# Altium PCB Analizador_de_espectro.PcbDoc (part 2 of 2)
Units mil, origin at the board's own origin, x right, y up, seen from the top; angles counter-clockwise.
Board outline 4891.73 x 3750 mil, 2 copper layers (Top Layer, Bottom Layer); 140 components, 98 nets, 612 pads, 248 vias.
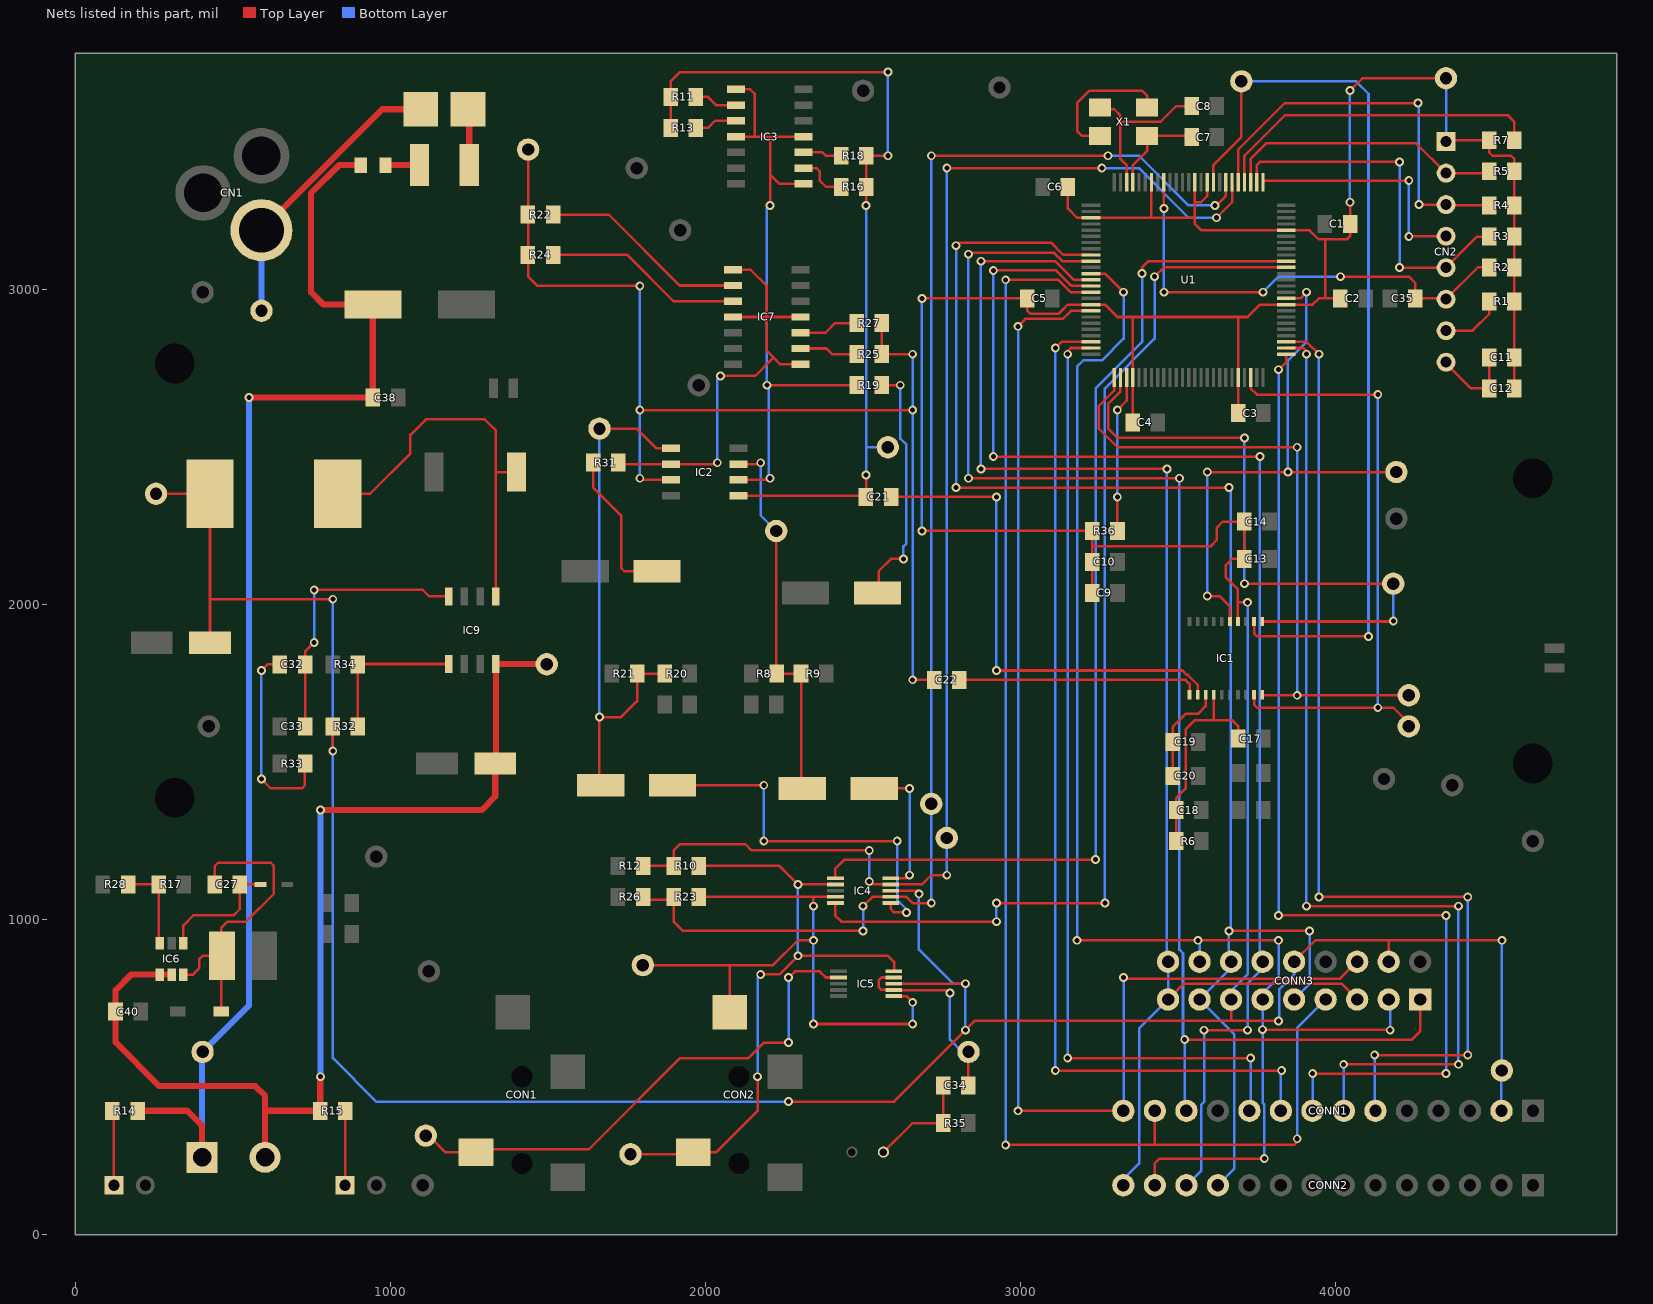
[diagram p2: the nets of this part, all layers, seen from the top]

## Via types
v1: diameter 28, hole 16, Top Layer to Bottom Layer, 248 vias

## Nets (pads, with @x,y where several pads share a name; then routed paths per layer and width w, separated by ;. In a path a pad name is that pad's centre, name@x,y a point inside that pad or via, vN(x,y) a via of type N, cw(c..) or ccw(c..) an arc to the next point about the centre after c; other vN are vias at no path point) (continued)
LCD_CS: CONN1.7 U1.77 | length 3326.3
  Top Layer w8: U1.77@3843.5,2814.96 3897.64,2814.96 3907.48,2805.12 v1(3907.48,2795.28) ; v1(3907.48,1043.31) v1(4389.76,1043.31) ; v1(4025.59,541.34) v1(4389.76,541.34)
  Bottom Layer w8: v1(3907.48,1043.31) v1(3907.48,2795.28) ; v1(4025.59,541.34) 4025.59,394.49 CONN1.7@4026.38,393.7 ; v1(4389.76,541.34) v1(4389.76,1043.31)
LCD_RD: CONN1.10 U1.49 | length 3071.7
  Top Layer w8: v1(3149.61,561.02) v1(3730.32,561.02) ; v1(3149.61,2795.28) 3149.61,2805.12 3159.45,2814.96 U1.49@3223.43,2814.96
  Bottom Layer w8: v1(3149.61,561.02) v1(3149.61,2795.28) ; CONN1.10@3726.38,393.7 3730.32,397.64 v1(3730.32,561.02)
LCD_RS: CONN1.8 U1.76 | length 3366.8
  Top Layer w8: v1(3818.9,1013.78) v1(4350.39,1013.78) ; v1(3818.9,2746.06) 3843.5,2770.67 U1.76@3843.5,2795.28 ; v1(3927.17,511.81) v1(4350.39,511.81)
  Bottom Layer w8: v1(3818.9,1013.78) v1(3818.9,2746.06) ; CONN1.8@3926.38,393.7 3927.17,394.49 v1(3927.17,511.81) ; v1(4350.39,511.81) v1(4350.39,1013.78)
LCD_RST: CONN1.6 U1.78 | length 3289.9
  Top Layer w8: U1.78@3843.5,2834.65 3907.48,2834.65 v1(3946.85,2795.28) ; v1(3946.85,1072.83) v1(4419.29,1072.83) ; v1(4124.02,570.87) v1(4419.29,570.87)
  Bottom Layer w8: v1(3946.85,1072.83) v1(3946.85,2795.28) ; v1(4124.02,570.87) 4124.02,396.06 CONN1.6@4126.38,393.7 ; v1(4419.29,570.87) v1(4419.29,1072.83)
LCD_WR: CONN1.9 U1.48 | length 3262.1
  Top Layer w8: v1(3110.24,521.65) v1(3828.74,521.65) ; v1(3110.24,2814.96) 3129.92,2834.65 U1.48@3223.43,2834.65
  Bottom Layer w8: v1(3110.24,521.65) v1(3110.24,2814.96) ; CONN1.9@3826.38,393.7 3826.38,519.29 v1(3828.74,521.65)
MIC-CH: C34.2 IC5.7 IC5.9 TP24.1 | length 635.5
  Top Layer w8: IC5.9@2597.44,816.93 2559.06,816.93 2549.21,807.09 2549.21,787.4 2559.06,777.56 IC5.7@2597.44,777.56 2599.22,775.78 2767.53,775.78 v1(2775.59,767.72) ; C34.2@2834.45,474.8 2834.45,580.51 TP24.1@2834.65,580.71
  Bottom Layer w8: v1(2775.59,767.72) 2775.59,620.08 2814.96,580.71 TP24.1@2834.65,580.71
MISO: CONN2.13 CONN3.2 CONN3.6 CONN3.17 U1.37 | length 4635.2
  Top Layer w8: v1(3179.13,935.04) v1(3562.99,935.04) v1(3818.9,935.04) ; U1.37@3223.43,3051.18 3267.72,3051.18 v1(3326.77,2992.13) ; CONN2.13@3426.38,157.48 3426.38,227.56 3440.88,242.06 v1(3773.69,242.06) ; v1(3768.11,651.18) 4171.65,651.18 v1(4173.23,649.61)
  Bottom Layer w8: v1(3179.13,935.04) 3179.13,2755.91 3198.94,2775.72 3258,2775.72 3326.77,2844.49 v1(3326.77,2992.13) ; CONN2.13@3425.2,158.66 CONN2.13@3426.38,157.48 ; CONN3.17@3568.11,867.09 v1@3568.11,935.04 ; v1(3773.69,242.06) 3773.81,242.19 3773.81,413.35 3768.11,419.05 v1(3768.11,651.18) CONN3.6@3768.11,747.09 3768.11,766.14 3818.9,816.93 v1(3818.9,935.04) ; CONN3.2@4168.11,747.09 4173.23,741.97 v1(4173.23,649.61)
MOSI: CONN2.14 CONN3.3 CONN3.9 CONN3.18 U1.38 | length 4599.2
  Top Layer w8: v1(2874.02,2431.1) v1(3464.57,2431.1) ; v1(2874.02,3090.55) 3109.88,3090.55 3168.93,3031.5 U1.38@3223.43,3031.5 ; CONN3.9@3468.11,747.09 3518.27,797.24 4017.95,797.24 CONN3.3@4068.11,747.09
  Bottom Layer w8: v1(2874.02,2431.1) v1(2874.02,3090.55) ; CONN2.14@3326.38,157.48 3326.38,176.77 3375.98,226.38 3375.98,654.96 CONN3.9@3468.11,747.09 CONN3.18@3468.11,867.09 3464.57,870.63 v1(3464.57,2431.1)
Netc7_2: C7.2 U1.22 X1.1 | length 302.6
  Top Layer w8: U1.22@3356.3,3341.54 3356.3,3395.67 3401.57,3440.94 X1.1@3401.57,3488.19 C7.2@3538.74,3488.19
Netc8_2: C8.2 U1.23 X1.3 | length 541.5
  Top Layer w8: X1.3@3251.97,3578.74 3257.87,3572.83 3297.24,3572.83 3316.93,3553.15 3316.93,3533.46 ; U1.23@3336.61,3341.54 3336.61,3395.67 3316.93,3415.35 3316.93,3533.46 ; C8.2@3542.68,3582.68 3494.09,3582.68 3444.88,3533.46 3316.93,3533.46
Netc11_2: C11.2 C12.2 CN2.8 | length 272.5
  Top Layer w8: CN2.8@4350.39,2770.08 4350.39,2765.75 4429.13,2687.01 C12.2@4487.56,2687.01 C11.2@4487.56,2785.43
NetC17_1: C17.1 C18.2 IC1.4 R6.2 | length 673.4
  Top Layer w8: R6.2@3493.46,1250 C18.2@3493.46,1348.43 3493.46,1387.17 3523.62,1417.32 3523.62,1604.33 3553.15,1633.86 3671.26,1633.86 3690.32,1614.8 C17.1@3690.32,1574.8 ; 3613.19,1634.84 IC1.4@3613.19,1714.57
NetC19_1: C19.1 C20.2 IC1.3 | length 324
  Top Layer w8: C20.2@3483.62,1456.69 C19.1@3483.62,1564.96 3483.62,1613.54 3523.62,1653.54 3562.99,1653.54 3587.6,1678.15 IC1.3@3587.6,1714.57
NetC21_1: C21.1 IC1.2 | length 1574.2
  Top Layer w8: C21.1@2589.21,2342.52 v1(2923.23,2342.52) ; v1(2923.23,1791.34) 3513.78,1791.34 3527.31,1777.81 3530.25,1777.81 3562.01,1746.05 IC1.2@3562.01,1714.57
  Bottom Layer w8: v1(2923.23,1791.34) v1(2923.23,2342.52)
NetC22_1: C22.1 IC1.1 | length 770.4
  Top Layer w8: C22.1@2805.75,1761.81 3523.62,1761.81 3536.42,1749.02 IC1.1@3536.42,1714.57
NetC24_1: C24.1 IC2.3 R8.1 R9.2 TP13.1 | length 1208.1
  Top Layer w8: IC2.3@2105.31,2446.26 2170.67,2446.26 v1(2175.2,2450.79) ; TP13.1@2224.41,2234.25 2224.41,1782.76 R8.1@2225.67,1781.5 R9.2@2303.15,1781.5 2303.15,1421.26 C24.1@2307.09,1417.32
  Bottom Layer w8: v1(2175.2,2450.79) 2175.2,2283.46 2219.49,2239.17 TP13.1@2219.49,2229.33
NetC24_2: C24.2 IC4.10 | length 451.9
  Top Layer w8: C24.2@2535.43,1417.32 v1(2647.64,1417.32) ; IC4.10@2587.6,1131.89 2637.8,1131.89 v1(2647.64,1141.73)
  Bottom Layer w8: v1(2647.64,1141.73) v1(2647.64,1417.32)
NetC25_1: C25.1 R19.2 | length 787.4
  Top Layer w8: C25.1@2545.28,2037.4 2549.21,2041.34 2549.21,2106.3 2588.58,2145.67 v1(2627.95,2145.67) ; R19.2@2559.68,2696.85 v1(2618.11,2696.85)
  Bottom Layer w8: v1(2618.11,2696.85) 2618.11,2527.71 2637.8,2508.03 2637.8,2194.88 2627.95,2185.04 v1(2627.95,2145.67)
NetC27_1: C27.1 D5.2 IC6.1 | length 401.3
  Top Layer w8: IC6.1@342.62,925.98 342.62,982.38 374.02,1013.78 501.97,1013.78 521.65,1033.46 C27.1@521.65,1112.2 D5.2@587.6,1112.2
NetC27_2: C27.2 D6.2 IC6.6 L2.1 | length 983.3
  Top Layer w8: IC6.6@342.62,825.98 373.23,825.98 393.7,846.46 393.7,875.98 403.54,885.83 L2.1@462.6,885.83 ; C27.2@441.65,1112.2 441.65,1170 452.76,1181.1 620.08,1181.1 629.92,1171.26 629.92,1082.68 541.34,994.09 482.28,994.09 462.6,974.41 L2.1@462.6,885.83 ; D6.2@462.6,708.66 L2.1@462.6,885.83
NetC32_1: C32.1 C33.1 IC9.4 | length 880.6
  Top Layer w8: C33.1@728.98,1614.17 C32.1@728.98,1811.02 728.98,1851.02 v1(757.87,1879.92) ; v1(757.87,2047.24) 1102.36,2047.24 1123.03,2026.57 IC9.4@1184.84,2026.57
  Bottom Layer w8: v1(757.87,1879.92) v1(757.87,2047.24)
NetC32_2: C32.2 R33.2 | length 634.3
  Top Layer w8: v1(590.55,1446.85) 620.08,1417.32 718.5,1417.32 728.35,1427.17 728.35,1495.43 R33.2@728.98,1496.06 ; v1(590.55,1791.34) 610.24,1811.02 C32.2@648.98,1811.02
  Bottom Layer w8: v1(590.55,1446.85) v1(590.55,1791.34)
NetC34_1: C34.1 MIC1.1 R35.1 | length 348
  Top Layer w8: MIC1.1@2564.61,262.64 2656.3,354.33 2753.98,354.33 R35.1@2754.45,354.8 C34.1@2754.45,474.8
Netc35_1: C35.1 CN2.6 R2.1 U1.17 | length 1502.4
  Top Layer w8: v1(3454.72,2992.13) v1(3769.69,2992.13) ; v1(3454.72,3257.87) U1.17@3454.72,3341.54 ; v1(4015.75,3041.34) 4133.86,3041.34 4232.28,3041.34 4252.6,3021.02 C35.1@4252.6,2972.44 4348.03,2972.44 CN2.6@4350.39,2970.08 4451.18,3070.87 R2.1@4487.56,3070.87
  Bottom Layer w8: v1(3454.72,2992.13) v1(3454.72,3257.87) ; v1(3769.69,2992.13) 3818.9,3041.34 v1(4015.75,3041.34)
NetC36_1: C36.1 IC2.5 R20.1 R21.2 TP16.1 | length 1701.8
  Top Layer w8: TP16.1@1663.39,2559.06 1781.5,2559.06 1844.29,2496.26 IC2.5@1890.75,2496.26 ; C36.1@1667.32,1427.17 1663.39,1431.1 v1(1663.39,1643.7) 1732.28,1643.7 1782.76,1694.17 R21.2@1782.76,1781.5 R20.1@1870.08,1781.5
  Bottom Layer w8: v1(1663.39,1643.7) TP16.1@1663.39,2559.06
NetC36_2: C36.2 IC4.6 | length 1192.5
  Top Layer w8: C36.2@1905.51,1427.17 v1(2185.04,1427.17) ; v1(2185.04,1250) v1(2608.27,1250) ; IC4.6@2587.6,1053.15 2587.6,1033.46 2588.58,1033.46 2598.43,1023.62 v1(2637.8,1023.62)
  Bottom Layer w8: v1(2185.04,1250) v1(2185.04,1427.17) ; v1(2608.27,1250) 2608.27,1062.99 2637.8,1033.46 v1(2637.8,1023.62)
NetC37_1: C37.1 R31.2 | length 489.8
  Top Layer w8: R31.2@1643.07,2450.79 1643.07,2372.68 1732.28,2283.46 1732.28,2116.14 1742.13,2106.3 C37.1@1846.46,2106.3
NetCN1_1: CN1.1 D1.1 TP18.1 | length 920.8
  Top Layer w19.68: CN1.1@590.55,3188.98 974.41,3572.83 D1.1@1096.46,3572.83
  Bottom Layer w19.68: TP18.1@590.55,2933.07 CN1.1@590.55,3188.98
NetCN2_2: CN2.2 R5.1 U1.3 | length 893
  Top Layer w8: U1.3@3730.32,3341.54 3730.32,3415.35 3779.53,3464.57 4255.91,3464.57 CN2.2@4350.39,3370.08 4481.65,3370.08 R5.1@4487.56,3375.98
NetCN2_3: CN2.3 R4.1 U1.5 | length 1283.1
  Top Layer w8: U1.5@3690.94,3341.54 3690.94,3444.88 3838.58,3592.52 v1(4261.81,3592.52) ; v1(4264.17,3270.08) CN2.3@4350.39,3270.08 4352.76,3267.72 R4.1@4487.56,3267.72
  Bottom Layer w8: v1(4261.81,3592.52) 4264.17,3590.16 v1(4264.17,3270.08)
NetCN2_4: CN2.4 U1.1 | length 760.2
  Top Layer w8: U1.1@3769.69,3341.54 3774.61,3346.46 v1(4232.28,3346.46) ; v1(4232.28,3169.29) 4233.07,3170.08 CN2.4@4350.39,3170.08
  Bottom Layer w8: v1(4232.28,3169.29) v1(4232.28,3346.46)
NetCN2_5: CN2.5 R3.1 U1.2 | length 1170.7
  Top Layer w8: U1.2@3750,3341.54 3750,3395.67 3759.84,3405.51 v1(4202.76,3405.51) ; v1(4202.76,3070.87) 4203.54,3070.08 CN2.5@4350.39,3070.08 4448.82,3168.5 R3.1@4486.77,3168.5
  Bottom Layer w8: v1(4202.76,3070.87) v1(4202.76,3405.51)
NetCN2_7: CN2.7 R1.1 | length 198.9
  Top Layer w8: CN2.7@4350.39,2870.08 4435.04,2870.08 4487.56,2922.6 R1.1@4487.56,2962.6
NetD1_2: D1.2 PS1.1 | length 181.1
  Top Layer w19.68: PS1.1@1250,3395.67 D1.2@1250,3576.77
NetD2_2: D2.2 IC9.1 L1.1 | length 1241.5
  Top Layer w8: L1.1@832.68,2352.36 935.04,2352.36 1062.99,2480.32 1062.99,2539.37 1112.2,2588.58 1299.21,2588.58 1334.84,2552.95 1334.84,2421.26 ; IC9.1@1334.84,2026.57 1334.84,2421.26 ; D2.2@1400.59,2421.26 1334.84,2421.26
NetD3_1: D3.1 R14.2 | length 238.1
  Top Layer w8: R14.2@117.48,393.7 122.05,389.13 D3.1@122.05,157.48
NetD4_1: D4.1 R15.1 | length 236.8
  Top Layer w8: D4.1@855.51,157.48 856.93,158.9 R15.1@856.93,393.7
NetFB1_1: FB1.1 PS1.2 | length 108.3
  Top Layer w19.68: FB1.1@984.25,3395.67 PS1.2@1092.52,3395.67
NetIC1_9: IC1.9 TP9.1 U1.73 | length 1997.2
  Top Layer w8: U1.73@3730.32,2721.46 3730.32,2687.01 3750,2667.32 v1(4133.86,2667.32) ; IC1.9@3741.14,1714.57 3741.14,1683.07 3750.98,1673.23 v1(4133.86,1673.23) 4183.07,1673.23 4232.28,1624.02 TP9.1@4242.13,1624.02
  Bottom Layer w8: v1(4133.86,1673.23) v1(4133.86,2667.32)
NetIC1_10: IC1.10 TP8.1 U1.51 | length 2090.1
  Top Layer w8: U1.51@3297.24,2721.46 3297.24,2680.11 3248.03,2630.9 3248.03,2559.06 3307.09,2500 v1(3877.95,2500) ; IC1.10@3766.73,1712.6 v1(3877.95,1712.6) TP8.1@4232.28,1712.6
  Bottom Layer w8: v1(3877.95,1712.6) v1(3877.95,2500)
NetIC1_11: IC1.11 TP7.1 U1.52 | length 2093.7
  Top Layer w8: U1.52@3316.93,2721.46 3316.93,2677.17 3277.56,2637.8 3277.56,2559.06 3307.09,2529.53 v1(3710.63,2529.53) ; v1(3710.63,2066.93) TP7.1@4183.07,2066.93 ; IC1.11@3766.73,1946.85 4171.26,1946.85 v1(4183.07,1948.82)
  Bottom Layer w8: v1(3710.63,2066.93) v1(3710.63,2529.53) ; v1(4183.07,1948.82) TP7.1@4183.07,2066.93
NetIC1_12: IC1.12 TP6.1 U1.9 | length 2922.1
  Top Layer w8: U1.9@3612.2,3341.54 3612.2,3395.67 3700.79,3484.25 TP6.1@3700.79,3661.42 ; IC1.12@3741.14,1946.85 3741.14,1908.46 3750,1899.61 v1(4104.33,1899.61)
  Bottom Layer w8: TP6.1@3700.79,3671.26 3710.63,3661.42 4064.96,3661.42 4104.33,3622.05 v1(4104.33,1899.61) ; TP6.1@3700.79,3690.94 TP6.1@3710.63,3681.1
NetIC1_15: IC1.15 TP5.1 U1.85 | length 1795.1
  Top Layer w8: v1(3592.52,2027.56) 3631.89,2027.56 3664.37,1995.08 IC1.15@3664.37,1946.85 ; v1(3592.52,2421.26) v1(3848.41,2421.25) TP5.1@4192.91,2421.26 ; U1.85@3843.5,2972.44 3887.8,2972.44 v1(3907.48,2992.13)
  Bottom Layer w8: v1(3592.52,2027.56) v1(3592.52,2421.26) ; v1(3848.41,2421.25) 3848.43,2775.59 3907.48,2834.65 v1(3907.48,2992.13)
NetIC3_2: IC3.2 R11.2 | length 138.5
  Top Layer w8: R11.2@1969.13,3612.2 2007.87,3612.2 2033.9,3586.18 IC3.2@2096.85,3586.18
NetIC3_3: IC3.3 R13.2 | length 137
  Top Layer w8: R13.2@1969.13,3513.78 2007.87,3513.78 2030.28,3536.18 IC3.3@2096.85,3536.18
NetIC3_9: IC3.9 R16.2 | length 165
  Top Layer w8: IC3.9@2311.42,3386.18 2352.01,3386.18 2362.2,3375.98 2362.2,3346.46 2381.89,3326.77 2420.63,3326.77 R16.2@2430.47,3316.93
NetIC3_10: IC3.10 R18.2 | length 123.6
  Top Layer w8: IC3.10@2311.42,3436.18 2370.91,3436.18 2381.89,3425.2 R18.2@2430.47,3425.2
NetIC4_1: IC4.1 U1.91 | length 3275.8
  Top Layer w8: IC4.1@2412.4,1131.89 2411.42,1132.87 2411.42,1161.42 2440.94,1190.94 v1(3238.19,1190.94) ; v1(3385.83,3051.18) 3385.83,3070.87 3405.51,3090.55 U1.91@3843.5,3090.55
  Bottom Layer w8: v1(3238.19,1190.94) 3238.19,2687.01 3385.83,2834.65 v1(3385.83,3051.18)
NetIC4_5: IC4.5 U1.90 | length 3447.2
  Top Layer w8: IC4.5@2412.4,1053.15 2411.42,1052.17 2411.42,1013.78 2431.1,994.09 v1(2923.23,994.09) ; v1(2923.23,1053.15) v1(3267.72,1053.15) ; v1(3425.2,3041.34) 3454.72,3070.87 U1.90@3843.5,3070.87
  Bottom Layer w8: v1(2923.23,994.09) v1(2923.23,1053.15) ; v1(3267.72,1053.15) 3267.72,2687.01 3425.2,2844.49 v1(3425.2,3041.34)
NetIC4_7: IC4.7 R23.2 R26.1 TP14.1 U1.7 | length 4518.5
  Top Layer w8: R26.1@1801.81,1062.99 1898.98,1062.99 1898.98,994.72 1929.13,964.57 v1(2500,964.57) ; v1(2500,1043.31) 2529.53,1072.83 IC4.7@2587.6,1072.83 2637.8,1072.83 2657.48,1053.15 v1(2716.54,1053.15) ; v1(2716.54,3425.2) v1(3277.56,3425.2) ; v1@3622.05,3267.72 3651.57,3297.24 U1.7@3651.57,3341.54
  Bottom Layer w8: v1(2500,964.57) v1(2500,1043.31) ; v1(2716.54,1053.15) TP14.1@2716.54,1368.11 v1(2716.54,3425.2) ; v1(3277.56,3425.2) 3375.98,3425.2 3533.46,3267.72 v1(3617.13,3267.72)
NetIC4_9: IC4.9 R10.2 R12.1 TP11.1 U1.6 | length 4443
  Top Layer w8: R12.1@1801.81,1171.26 R10.2@1898.98,1171.26 1898.98,1219.84 1919.29,1240.16 2125.98,1240.16 2145.67,1220.47 v1(2519.68,1220.47) ; v1(2519.68,1122.05) 2529.53,1112.2 IC4.9@2587.6,1112.2 2687.01,1112.2 2716.54,1141.73 v1(2765.75,1141.73) ; v1(2765.75,3385.83) v1(3257.87,3385.83) ; v1(3622.05,3228.35) 3671.26,3277.56 U1.6@3671.26,3341.54
  Bottom Layer w8: v1(2519.68,1122.05) v1(2519.68,1220.47) ; v1(2765.75,1141.73) TP11.1@2765.75,1259.84 v1(2765.75,3385.83) ; v1(3257.87,3385.83) 3375.98,3385.83 3533.46,3228.35 v1(3622.05,3228.35)
NetIC6_3: IC6.3 R17.1 R28.2 | length 284.7
  Top Layer w8: R28.2@167.32,1112.2 R17.1@264.49,1112.2 264.49,929.11 IC6.3@267.62,925.98
NetIC7_2: IC7.2 R22.2 | length 664.3
  Top Layer w8: R22.2@1516.38,3238.19 1692.91,3238.19 1917.72,3013.39 IC7.2@2087.6,3013.39
NetIC7_3: IC7.3 R24.2 | length 632
  Top Layer w8: R24.2@1516.38,3110.24 1751.97,3110.24 1898.82,2963.39 IC7.3@2087.6,2963.39
NetIC7_9: IC7.9 R25.2 | length 185
  Top Layer w8: IC7.9@2302.17,2813.39 2383.46,2813.39 2401.57,2795.28 R25.2@2479.68,2795.28
NetIC7_10: IC7.10 R27.2 | length 190.1
  Top Layer w8: IC7.10@2302.17,2863.39 2381.1,2863.39 2411.42,2893.7 R27.2@2479.68,2893.7
NetIC9_5: IC9.5 R32.2 R34.2 | length 485.8
  Top Layer w8: R32.2@896.3,1614.17 R34.2@896.3,1811.02 897.28,1812.01 IC9.5@1184.84,1812.01
NetR7_1: R7.1 U1.4 | length 1060.4
  Top Layer w8: U1.4@3710.63,3341.54 3710.63,3425.2 3838.58,3553.15 4547.24,3553.15 4567.56,3532.83 R7.1@4567.56,3474.41
NetR36_1: R36.1 U1.53 | length 499.7
  Top Layer w8: v1(3307.09,2342.52) 3307.09,2234.88 R36.1@3307.72,2234.25 ; v1(3307.09,2618.11) 3336.61,2647.64 U1.53@3336.61,2721.46
  Bottom Layer w8: v1(3307.09,2342.52) v1(3307.09,2618.11)
NetX1_2: X1.2 X1.4 | length 450.6
  Top Layer w8: X1.4@3251.97,3488.19 3194.88,3488.19 3179.13,3503.94 3179.13,3592.52 3218.5,3631.89 3385.83,3631.89 3401.57,3616.14 X1.2@3401.57,3578.74
R-CH: CON1.3 IC5.2 TP26.1 | length 1705.1
  Top Layer w8: TP26.1@1102.36,305.12 1131.89,305.12 1175.2,261.81 CON1.3@1271.65,261.81 1281.56,271.72 1629.98,271.72 1919.29,561.02 2135.83,561.02 2185.04,610.24 v1(2263.78,610.24) ; v1(2263.78,816.93) 2283.46,836.61 2362.2,836.61 2381.89,816.93 IC5.2@2422.24,816.93
  Bottom Layer w8: v1(2263.78,610.24) v1(2263.78,816.93)
R_SW_A_1: IC2.2 IC3.1 IC3.4 IC3.8 IC3.11 R19.1 | length 2016
  Top Layer w8: IC3.4@2096.85,3486.18 2155.51,3486.18 ; IC3.1@2096.85,3636.18 2141.38,3636.18 2155.51,3622.05 2155.51,3486.18 ; IC2.2@2105.31,2396.26 2199.41,2396.26 v1(2204.72,2401.57) ; v1(2194.88,2696.85) 2352.36,2696.85 R19.1@2479.68,2696.85 ; v1(2204.72,3267.72) 2204.72,3366.14 ; IC3.11@2309.49,3484.25 IC3.11@2311.42,3486.18 2204.72,3486.18 ; IC3.8@2311.42,3336.18 2234.69,3336.18 2204.72,3366.14 ; 2155.51,3486.18 2204.72,3486.18 ; 2204.72,3366.14 2204.72,3486.18
  Bottom Layer w8: v1(2204.72,2401.57) 2201.2,2405.1 2201.2,2690.54 v1(2194.88,2696.85) 2194.88,3257.87 v1(2204.72,3267.72)
R_SW_A_2: IC2.6 IC7.1 IC7.4 IC7.8 IC7.11 R31.1 | length 1464.7
  Top Layer w8: R31.1@1723.07,2450.79 1727.6,2446.26 IC2.6@1890.75,2446.26 2032.87,2446.26 v1(2037.4,2450.79) ; v1(2047.24,2726.38) 2157.87,2726.38 2215.75,2784.25 ; IC7.4@2087.6,2913.39 2194.88,2913.39 ; IC7.1@2087.6,3063.39 2143.31,3063.39 2194.88,3011.81 2194.88,2913.39 ; IC7.8@2302.17,2763.39 2236.61,2763.39 2215.75,2784.25 ; IC7.11@2302.17,2913.39 2194.88,2913.39 ; 2194.88,2913.39 2194.88,2805.12 2215.75,2784.25
  Bottom Layer w8: v1(2037.4,2450.79) 2037.4,2716.54 v1(2047.24,2726.38)
R_SW_B_1: C21.2 IC2.1 R11.1 R13.1 R16.1 R18.1 TP12.1 | length 2740.7
  Top Layer w8: R13.1@1889.13,3513.78 R11.1@1889.13,3612.2 1889.13,3660.79 1919.29,3690.94 v1(2578.74,3690.94) ; IC2.1@2105.31,2346.26 2505.47,2346.26 C21.2@2509.21,2342.52 2509.84,2343.15 v1(2509.84,2411.42) ; v1(2509.84,3267.72) 2510.47,3268.35 R16.1@2510.47,3326.77 R18.1@2510.47,3425.2 v1(2578.74,3425.2)
  Bottom Layer w8: v1(2509.84,2411.42) 2509.84,2500 ; v1(2509.84,3267.72) 2509.84,2500 ; TP12.1@2578.74,2500 2509.84,2500 ; v1(2578.74,3425.2) v1(2578.74,3690.94)
R_SW_B_2: C22.2 IC2.7 R22.1 R24.1 R25.1 R27.1 TP15.1 | length 3646.5
  Top Layer w8: TP15.1@1437.01,3444.88 1437.01,3041.34 1466.54,3011.81 v1(1791.34,3011.81) ; v1(1791.34,2401.57) 1791.34,2400.79 1795.87,2396.26 IC2.7@1890.75,2396.26 ; v1(1791.34,2618.11) v1(2657.48,2618.11) ; R27.1@2559.68,2893.7 R25.1@2559.68,2795.28 v1(2657.48,2795.28) ; v1(2657.48,1761.81) C22.2@2725.75,1761.81
  Bottom Layer w8: v1(1791.34,2401.57) v1(1791.34,2618.11) v1(1791.34,3011.81) ; v1(2657.48,1761.81) v1(2657.48,2618.11) v1(2657.48,2795.28)
SCK: CONN2.11 CONN3.5 CONN3.8 CONN3.16 U1.34 | length 4907.7
  Top Layer w8: v1(2795.28,2372.05) v1(3661.42,2372.05) ; v1(2795.28,3139.76) 2805.12,3149.61 3096.08,3149.61 3135.45,3110.24 U1.34@3223.43,3110.24 ; v1(3661.42,964.57) v1(3917.32,964.57)
  Bottom Layer w8: v1(2795.28,2372.05) v1(2795.28,3139.76) ; CONN2.11@3626.38,157.48 3678.94,210.05 3678.94,636.25 CONN3.8@3568.11,747.09 3668.11,847.09 CONN3.16@3668.11,867.09 3661.42,873.78 v1(3661.42,964.57) 3667.61,970.76 3667.61,2365.86 v1(3661.42,2372.05) ; CONN3.5@3868.11,747.09 3917.32,796.3 v1(3917.32,964.57)
SD_CS: CONN2.12 CONN3.15 U1.39 | length 4261.4
  Top Layer w8: v1(2913.39,2470.47) v1(3759.84,2470.47) ; v1(2913.39,3061.02) 3113,3061.02 3162.21,3011.81 U1.39@3223.43,3011.81 ; v1(3582.68,649.61) v1(3720.47,649.61)
  Bottom Layer w8: v1(2913.39,2470.47) v1(2913.39,3061.02) ; CONN2.12@3526.38,157.48 3573.81,204.91 3573.81,413.35 3582.68,422.21 v1(3582.68,649.61) ; v1(3720.47,649.61) 3720.8,649.94 3720.8,727.31 3720.68,727.44 3720.68,766.73 3720.8,766.86 3720.8,797.57 3768.11,844.88 CONN3.15@3768.11,867.09 ; CONN3.15@3759.84,867.09 v1(3759.84,2470.47)
SSEL: CONN1.12 CONN3.1 U1.35 | length 4661.1
  Top Layer w8: v1(2834.65,2401.57) v1(3503.94,2401.57) ; v1(2834.65,3112.77) 2838.43,3116.55 3106.51,3116.55 3132.51,3090.55 U1.35@3223.43,3090.55 ; v1(3520.8,620.08) 4242.13,620.08 4268.11,646.06 CONN3.1@4268.11,747.09
  Bottom Layer w8: v1(2834.65,2401.57) v1(2834.65,3112.77) ; v1(3503.94,2401.57) 3503.94,905.51 3515.54,893.91 3515.54,625.34 v1(3520.8,620.08) 3520.8,393.7 CONN1.12@3526.38,393.7
T_CS: CONN1.13 CONN3.4 U1.40 | length 4560.2
  Top Layer w8: v1(2952.76,285.43) 3425.2,285.43 ; v1(2952.76,3031.5) 3119.9,3031.5 3155.59,2995.81 3155.76,2995.81 3159.45,2992.13 U1.40@3223.43,2992.13 ; CONN1.13@3426.38,393.7 3426.38,286.61 3425.2,285.43 ; v1(3877.95,305.12) 3877.95,295.28 3868.11,285.43 3425.2,285.43
  Bottom Layer w8: v1(2952.76,285.43) v1(2952.76,3031.5) ; v1(3877.95,305.12) 3877.95,656.93 CONN3.4@3968.11,747.09
T_IRQ: CONN1.14 CONN3.12 U1.43 | length 4264.8
  Top Layer w8: v1(2992.13,393.7) CONN1.14@3326.38,393.7 ; v1(2992.13,2883.86) 3015.62,2907.35 3024.74,2907.35 3024.87,2907.23 3098.92,2907.23 3099.04,2907.35 3133.73,2907.35 3159.45,2933.07 U1.43@3223.43,2933.07 ; v1(3326.77,816.93) 3330.46,813.24 4014.27,813.24 CONN3.12@4068.11,867.09
  Bottom Layer w8: v1(2992.13,393.7) v1(2992.13,2883.86) ; CONN1.14@3326.38,393.7 3326.77,394.09 v1(3326.77,816.93)
VCC: C1.1 C2.1 C3.1 C4.1 C5.1 C6.1 C9.1 C10.1 C11.1 C12.1 C13.2 C14.1 C30.1 CN2.1 CONN1.2 CONN3.7 CONN3.11 CONN3.14 IC1.14 IC4.8 IC5.8 L1.2 R1.2 R2.2 R3.2 R4.2 R5.2 R7.2 R32.1 R36.2 TP2.1 TP21.1 TP23.1 U1.10 U1.12 U1.19 U1.28 U1.42 U1.54 U1.71 U1.84 U1.96 | length 17427.8
  Top Layer w8: TP21.1@255.91,2352.36 L1.2@427.17,2352.36 427.17,2017.72 ; C30.1@427.17,1879.92 427.17,2017.72 ; R32.1@816.3,1614.17 816.3,1536.06 v1(816.93,1535.43) ; v1(816.93,2017.72) 427.17,2017.72 ; v1(2263.78,423.23) 2598.43,423.23 v1(2824.8,649.61) 2854.33,679.13 v1(3818.9,679.13) ; IC4.8@2587.6,1092.52 2677.17,1092.52 v1(2677.17,1082.68) ; IC5.8@2597.44,797.24 v1(2824.8,797.24) ; v1(2687.01,2234.25) R36.2@3227.72,2234.25 3227.72,2185.04 ; v1(2687.01,2972.44) C5.1@3021.02,2972.44 3021.02,2933.7 3031.5,2923.23 3092.29,2923.23 3092.42,2923.35 3120.58,2923.35 3136.15,2938.93 3136.15,2939.3 3149.61,2952.76 U1.42@3223.43,2952.76 3267.72,2952.76 3307.09,2913.39 3356.3,2913.39 ; C6.1@3150.24,3316.93 3150.24,3257.24 3179.13,3228.35 U1.28@3223.43,3228.35 3415.35,3228.35 ; C9.1@3227.72,2037.4 C10.1@3227.72,2135.83 3227.72,2185.04 ; C4.1@3356.3,2579.37 U1.54@3356.3,2721.46 3356.3,2913.39 ; U1.19@3415.35,3341.54 3415.35,3228.35 ; U1.12@3553.15,3341.54 3553.15,3277.56 ; U1.10@3592.52,3341.54 3592.52,3297.24 3572.83,3277.56 3553.15,3277.56 ; CONN3.7@3664.93,747.09 CONN3.7@3668.11,747.09 3668.11,682.28 ; IC1.14@3689.96,1946.85 3689.96,2007.87 ; C3.1@3690.95,2608.27 U1.71@3690.95,2721.46 3690.95,2913.39 ; v1(3720.47,2007.87) 3689.96,2007.87 ; CONN3.14@3868.11,867.09 3936.06,935.04 v1(4527.56,935.04) ; C2.1@4015.12,2972.44 3966.54,2972.44 ; v1(4045.28,3277.56) 4045.91,3276.93 C1.1@4045.91,3208.66 4045.91,3169.92 4035.43,3159.45 3966.54,3159.45 ; v1(4045.28,3631.89) 4084.65,3671.26 TP2.1@4350.39,3671.26 ; CONN3.11@4168.11,867.09 4168.11,935.04 ; CN2.1@4350.39,3470.08 4354.72,3474.41 R7.2@4487.56,3474.41 4487.56,3435.67 4498.03,3425.2 4557.09,3425.2 4567.56,3414.72 R5.2@4567.56,3375.98 R3.2@4567.56,3169.29 R2.2@4567.56,3070.87 R1.2@4567.56,2962.6 C11.1@4567.56,2785.43 C12.1@4567.56,2687.01 ; 3227.72,2185.04 3602.36,2185.04 3622.05,2204.72 3622.05,2244.09 3641.73,2263.78 C14.1@3710,2263.78 C13.2@3710,2145.67 3671.26,2145.67 3651.57,2125.98 3651.57,2086.61 3689.96,2048.23 3689.96,2007.87 ; 3356.3,2913.39 3720.47,2913.39 3759.84,2952.76 U1.84@3843.5,2952.76 3927.17,2952.76 3946.85,2972.44 3966.54,2972.44 ; 3415.35,3228.35 3553.15,3228.35 3553.15,3238.19 ; 3553.15,3238.19 3553.15,3277.56 ; 3553.15,3238.19 3553.15,3208.66 3572.83,3188.98 U1.96@3843.5,3188.98 3917.32,3188.98 3917.32,3188.6 3946.47,3159.45 3966.54,3159.45 ; 3966.54,2972.44 3966.54,3159.45
  Bottom Layer w8: v1(816.93,2017.72) v1(816.93,1535.43) 816.93,561.02 954.72,423.23 v1(2263.78,423.23) ; v1(2677.17,1082.68) 2677.17,905.51 2785.43,797.24 v1(2824.8,797.24) v1(2824.8,649.61) ; v1(2687.01,2234.25) v1(2687.01,2972.44) ; CONN3.7@3668.11,747.09 3668.11,774.41 3720.47,826.77 v1(3720.47,2007.87) ; v1(3818.9,679.13) 3820.68,680.91 3820.68,779.34 3868.11,826.77 CONN3.14@3868.11,867.09 ; v1(4045.28,3277.56) v1(4045.28,3631.89) ; CN2.1@4350.39,3470.08 TP2.1@4350.39,3671.26 ; CONN1.2@4526.38,393.7 4526.38,520.47 TP23.1@4527.56,521.65 v1(4527.56,935.04)
VIN: C31.1 C40.1 IC6.4 IC6.5 IC9.8 R15.2 SW1.2 TP20.1 | length 3390.1
  Top Layer w19.68: IC6.5@305.12,825.98 IC6.4@267.62,825.98 176.38,825.98 127.32,776.93 C40.1@127.32,708.66 127.32,610.87 265.75,472.44 570.87,472.44 601.97,441.34 601.97,393.7 ; SW1.2@601.97,246.06 601.97,393.7 ; v1(777.56,501.97) 776.93,501.34 R15.2@776.93,393.7 601.97,393.7 ; v1(777.56,1348.43) 1289.37,1348.43 1332.68,1391.73 C31.1@1332.68,1496.06 1334.84,1498.23 IC9.8@1334.84,1812.01 1495.08,1812.01 TP20.1@1496.06,1811.02
  Bottom Layer w19.68: v1(777.56,501.97) v1(777.56,1348.43)
VIN_SW: C29.1 C38.1 FB1.2 R14.1 SW1.1 TP19.1 | length 4207.2
  Top Layer w19.68: R14.1@197.48,393.7 354.33,393.7 401.97,346.06 SW1.1@401.97,246.06 ; v1(551.18,2657.48) C38.1@944.25,2657.48 943.9,2657.83 C29.1@943.9,2952.76 787.4,2952.76 748.03,2992.13 748.03,3307.09 836.61,3395.67 FB1.2@905.51,3395.67
  Bottom Layer w8: TP19.1@401.97,579.13 TP19.1@403.54,580.71
  Bottom Layer w19.68: SW1.1@401.97,246.06 TP19.1@401.97,579.13 ; TP19.1@403.54,580.71 551.18,728.35 v1(551.18,2657.48)
VINL: CON2.2 IC4.4 IC5.6 R23.1 TP27.1 | length 2013.5
  Top Layer w8: TP27.1@1801.18,856.3 2076.77,856.3 ; R23.1@1978.35,1062.36 R23.1@1978.98,1062.99 ; R23.1@1978.98,1072.83 2342.52,1072.83 ; CON2.2@2076.77,706.69 2076.77,856.3 ; v1(2342.52,669.29) v1(2657.48,669.29) ; v1(2342.52,935.04) 2293.31,935.04 2214.57,856.3 2076.77,856.3 ; v1(2342.52,1043.31) 2342.52,1072.83 ; IC4.4@2412.4,1072.83 2342.52,1072.83 ; IC5.6@2597.44,757.87 2637.8,757.87 v1(2657.48,738.19)
  Bottom Layer w8: v1(2342.52,669.29) v1(2342.52,935.04) v1(2342.52,1043.31) ; v1(2657.48,669.29) v1(2657.48,738.19)
VINR: CON2.3 IC4.2 IC5.10 R10.1 TP25.1 | length 2067.8
  Top Layer w8: TP25.1@1761.81,255.91 1954.72,255.91 CON2.3@1960.63,261.81 2033.46,261.81 2165.35,393.7 v1(2165.35,501.97) ; R10.1@1978.98,1171.26 2234.25,1171.26 v1(2293.31,1112.2) IC4.2@2412.4,1112.2 ; v1(2175.2,826.77) 2234.25,826.77 v1(2293.31,885.83) 2578.74,885.83 2598.43,866.14 2598.43,837.6 IC5.10@2597.44,836.61
  Bottom Layer w8: v1(2165.35,501.97) 2165.35,816.93 v1(2175.2,826.77) ; v1(2293.31,885.83) v1(2293.31,1112.2)
pads on no net: C1.0 C2.0 C3.0 C4.0 C5.0 C6.0 C7.0 C8.0 C9.0 C10.0 C11.0 C12.0 C13.0 C14.0 C15.0 C16.0 C17.0 C18.0 C19.0 C20.0 C21.0 C22.0 C23.0 C26.0 C27.0 C28.0 C32.0 C33.0 C34.0 C35.0 C38.0 C39.0 C40.0 CON1. CON1.4 CON2. CON2.4 R1.0 R2.0 R3.0 R4.0 R5.0 R6.0 R7.0 R8.0 R9.0 R10.0 R11.0 R12.0 R13.0 R14.0 R15.0 R16.0 R17.0 R18.0 R19.0 R20.0 R21.0 R22.0 R23.0 R24.0 R25.0 R26.0 R27.0 R28.0 R31.0 R32.0 R33.0 R34.0 R35.0 R36.0 U1.8 U1.13 U1.14 U1.16 U1.18 U1.20 U1.21 U1.24 U1.25 U1.26 U1.27 U1.29 U1.30 U1.32 U1.33 U1.44 U1.45 U1.50 U1.56 U1.64 U1.65 U1.66 U1.67 U1.68 U1.69 U1.70 U1.74 U1.82 U1.86 U1.87 U1.88 U1.89 U1.98 U1.99 U1.100

## Polygon pours and split planes (outlines as drawn)
EARTH on Top Layer "Top Layer-No Net" (solid, pour order 16): 0,3750 1348.43,3750 1348.43,2618.11 0,2618.11
AGND on Top Layer "Top Layer-No Net" (solid, pour order 6): 2874.02,1830.71 4891.73,1830.71 4891.73,1141.73 2874.02,1141.73
GND on Top Layer "Top Layer-No Net" (solid, pour order 10): 4891.73,1122.05 2874.02,1122.05 2874.02,0 4891.73,0
GND on Top Layer "Top Layer-No Net" (solid, pour order 12): 4891.73,3750 2874.02,3750 2874.02,1840.55 4891.73,1840.55
AGND on Top Layer "Top Layer-No Net" (solid, pour order 22): 0,3750 2883.86,3750 2883.86,0 0,0
GND on Bottom Layer "Top Layer-No Net" (solid, pour order 26): 0,3750 0,0 4891.73,0 4891.73,3750

## Keep-outs
Keep-Out Layer:
  circle w10: c4625.98,2401.57 r127.95
  circle w10: c314.96,1387.8 r127.95
  circle w10: c4625.98,1496.06 r127.95
  circle w10: c314.96,2765.75 r127.95
  lines w1.97: 29.53,29.53 29.53,3720.47 4862.2,3720.47 4862.2,29.53 2972.44,29.53 29.53,29.53

## Silkscreen, mask and mechanical layers (free items; w line width, h text height)
Top Overlay:
  text "EARTH" at 324.8,3061.02 h30
  text "Vin" at 669.29,2834.65 h30
  text "Copyright Hojnadel - Salazar Ato / Octubre, 2017 / Rev.: 00001" at 265.75,2647.64 h30 r90
  text "+3V3" at 187.01,2263.78 h30
  text "DGND" at 442.91,1535.43 h30
  text "+5V" at 984.25,1131.89 h30
  text "Vin" at 452.76,610.24 h30
  text "AGND" at 1043.31,68.9 h30
Mechanical 1:
  the board outline again, w1.97

## Text inside footprints (layer, text, board x,y; h text height)
C14: Top Overlay "+" at 3662,2288.78 h39.37
C16: Top Overlay "+" at 3818.32,1323.43 h39.37 r180
C17: Top Overlay "+" at 3642.32,1599.8 h39.37
C19: Top Overlay "+" at 3435.62,1589.96 h39.37
C21: Top Overlay "+" at 2637.21,2317.52 h39.37 r180
C22: Top Overlay "+" at 2853.75,1736.81 h39.37 r180
C24: Top Overlay "+" at 2223.26,1485.32 h39.37
C25: Top Overlay "+" at 2629.1,1969.4 h39.37 r180
C29: Top Overlay "+" at 864.52,3004.76 h39.37
C30: Top Overlay "+" at 501.65,1808.92 h39.37 r180
C31: Top Overlay "+" at 1407.16,1425.06 h39.37 r180
C36: Top Overlay "+" at 1583.5,1495.17 h39.37
C37: Top Overlay "+" at 1930.28,2038.3 h39.37 r180
D1: Top Overlay "A" at 1062.99,3651.57 h30; Top Overlay "K" at 1230.32,3651.57 h30
D2: Top Overlay "A" at 1122.05,2224.41 h30; Top Overlay "K" at 1387.8,2224.41 h30
D3: Top Overlay "A" at 108.27,49.21 h39.37
D4: Top Overlay "A" at 760.51,142.48 h39.37